# EAGLE board esp32-driver (EAGLE 9.6.2)
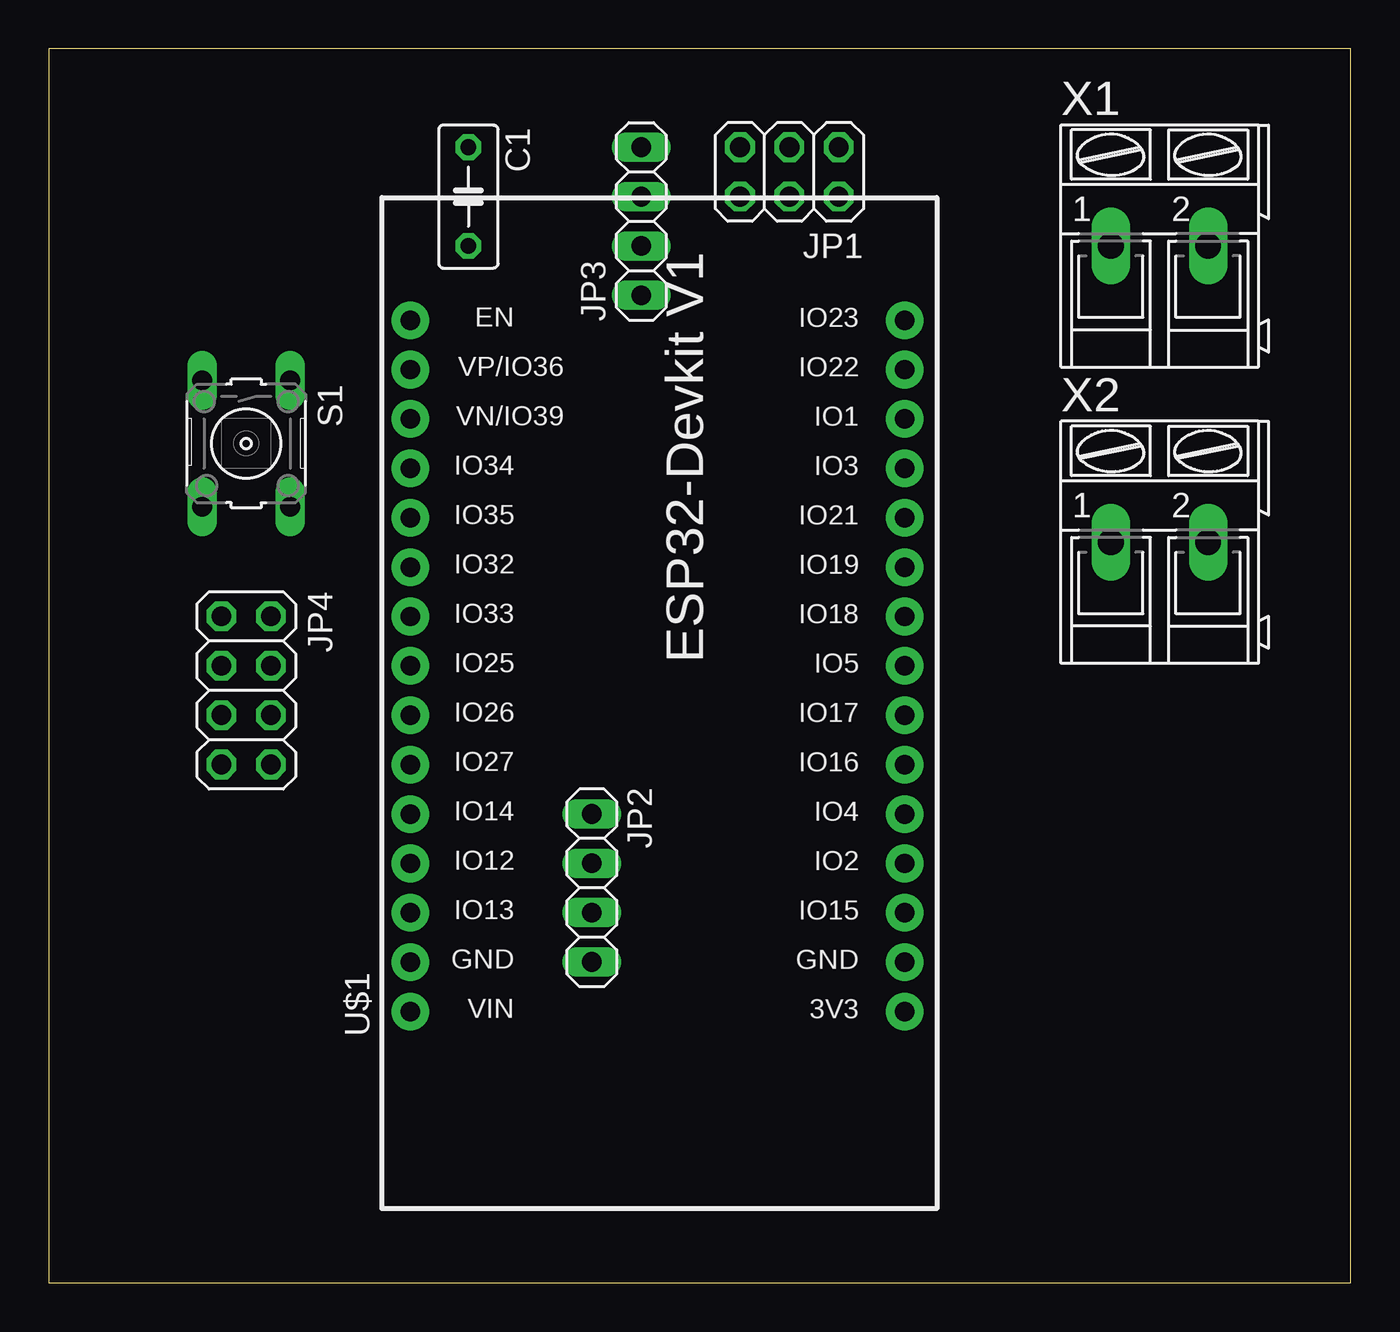
[diagram p0: board, top side]
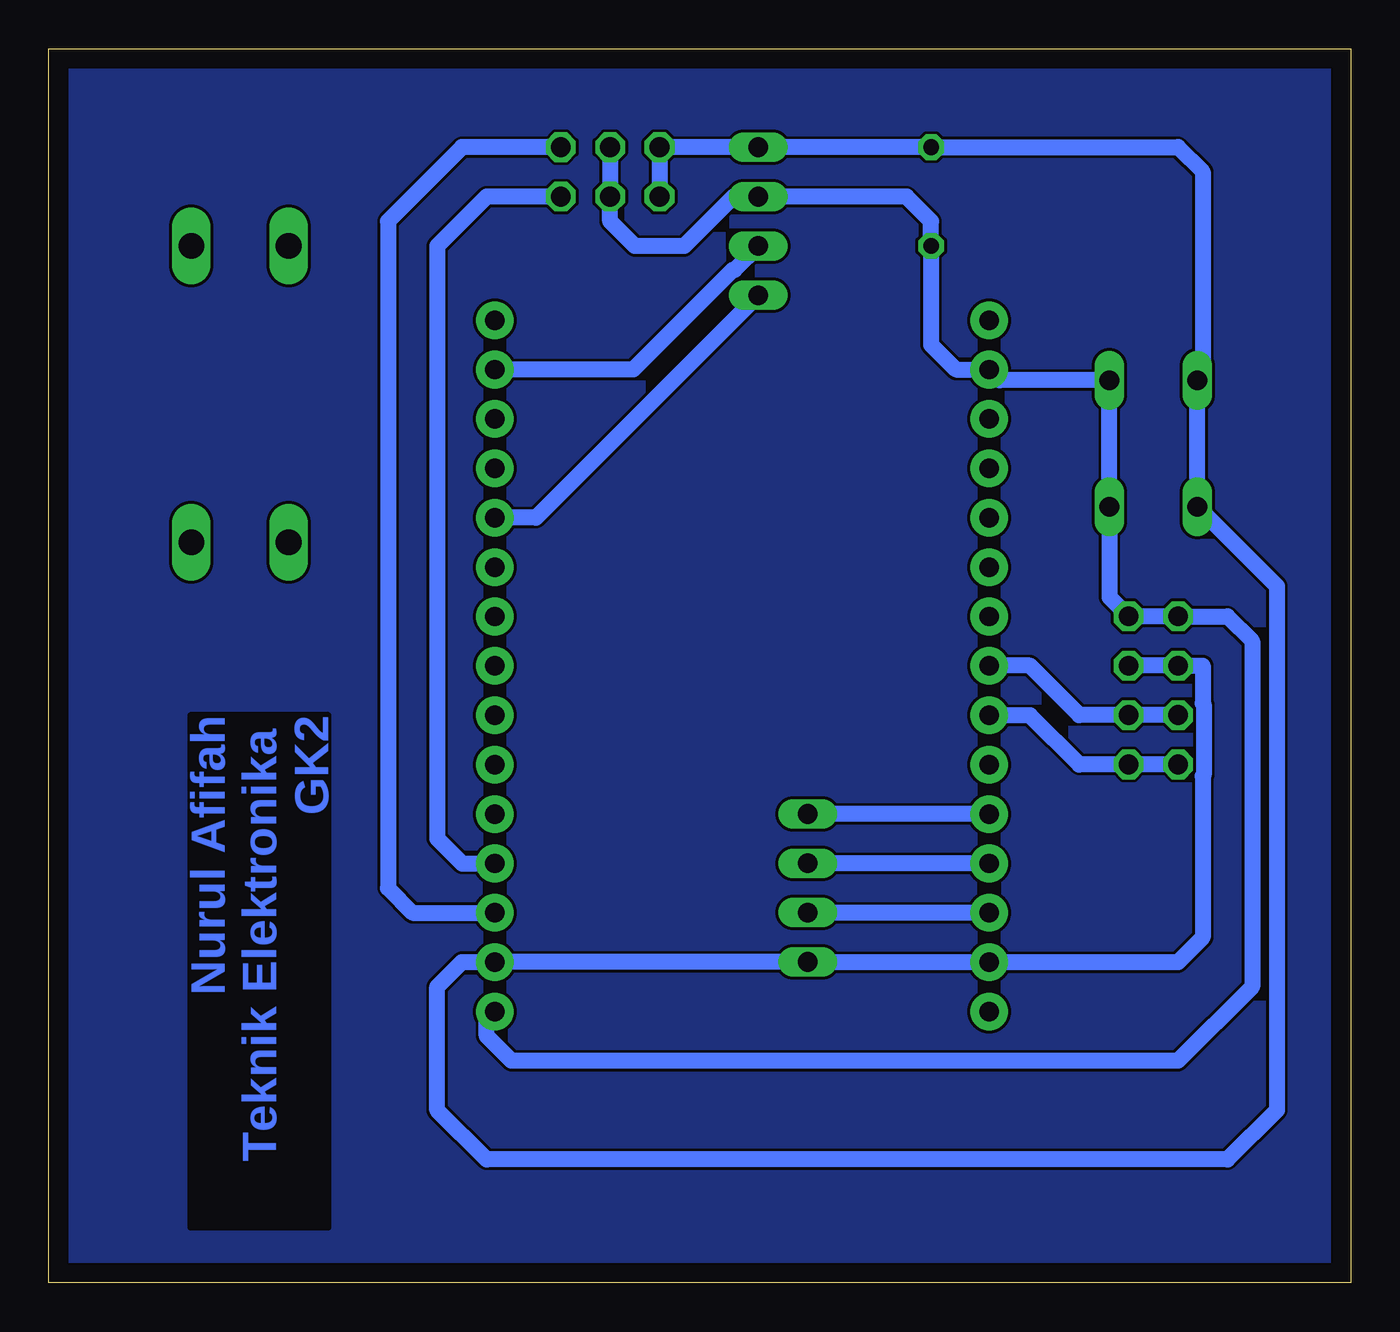
[diagram p1: board, bottom side, seen from below]

Size 66.98 x 63.49 mm. Coordinates in mm from the lower left corner, seen from the top.
Outline: 0,0 66.98,0 66.98,63.49 0,63.49 0,0
Copper layers (1*16): Top 0.035mm / dielectric 1.5mm / Bottom 0.035mm
Design rules "default": minimum track width 6mil, minimum drill 0.35mm, track to track 6mil, track to pad 6mil, pad to pad 6mil, via to via 6mil, smd to smd 6mil, copper to edge 40mil, drill to drill 6mil, minimum pad ring 10mil, minimum via ring 8mil, stop-mask expansion 4mil, vias tented up to drill 0mil, thermal gap 10mil

## Footprints (pad centres in the part's own frame; a part is rotated, then mirrored left to right if it is on the bottom)
C050-030X075 = drill 0.813 octagon: 1 -2.54,0; 2 2.54,0
2X03 = drill 1.016 octagon: 1 -2.54,-1.27; 2 -2.54,1.27; 3 0,-1.27; 4 0,1.27; 5 2.54,-1.27; 6 2.54,1.27
1X04 = drill 1.016 long: 1 -3.81,0; 2 -1.27,0; 3 1.27,0; 4 3.81,0
2X04 = drill 1.016 octagon: 1 -3.81,-1.27; 2 -3.81,1.27; 3 -1.27,-1.27; 4 -1.27,1.27; 5 1.27,-1.27; 6 1.27,1.27; 7 3.81,-1.27; 8 3.81,1.27
B3F-10XX = drill 1.016 long: 1 -3.251,2.261; 2 3.251,2.261; 3 -3.251,-2.261; 4 3.251,-2.261
ESP32-DEVKITV1 = drill 1 pad 1.93: 3V3 -16.52,-12.27; D1 13.96,-12.27; D2 -8.9,-12.27; D3 11.42,-12.27; D4 -6.36,-12.27; D5 1.26,-12.27; D12 -8.9,13.135; D13 -11.44,13.135; D14 -6.36,13.135; D15 -11.44,-12.27; D16 -3.82,-12.27; D17 -1.28,-12.27; D18 3.8,-12.27; D19 6.34,-12.27; D21 8.88,-12.27; D22 16.5,-12.27; D23 19.04,-12.27; D25 1.26,13.135; D26 -1.28,13.135; D27 -3.82,13.135; D32 6.34,13.135; D33 3.8,13.135; D34 11.42,13.135; D35 8.88,13.135; D36 16.5,13.135; D39 13.96,13.135; EN 19.04,13.135; GND@1 -13.98,13.135; GND@2 -13.98,-12.27; VIN -16.52,13.135
AK300/2 = drill 1.321 long: 1 -2.515,0; 2 2.489,0

## Placement (x,y rotation side)
C1  [C050-030X075]  21.59,55.88 270 top
JP1  [2X03]  38.1,57.15 180 top
JP2  [1X04]  27.94,20.32 270 top
JP3  [1X04]  30.48,54.61 90 top
JP4  [2X04]  10.16,30.48 270 top
S1  [B3F-10XX]  10.16,43.18 270 top
U$1  ESP32DEVKITV1  [ESP32-DEVKITV1]  31.75,30.48 90 top
X1  [AK300/2]  57.15,53.34 0 top
X2  [AK300/2]  57.15,38.1 0 top

## Library data of the parts
C1 = rcl; SPICEPREFIX: C
JP1-JP4 = pinhead
S1 = switch-omron; MPN: B3F-1000; OC_FARNELL: 176432; OC_NEWARK: 36M3542
U$1 = esp32-devkitv1
X1 X2 = con-ptr500; OC_FARNELL: unknown; OC_NEWARK: unknown

## Nets
GND: C1.1 JP1.5 JP1.6 JP2.4 JP3.4 JP4.3 JP4.4 S1.3 S1.4 U$1.GND@1 U$1.GND@2
MOISTURE: JP1.2 U$1.D2
OUT1: JP2.1 U$1.D14
OUT2: JP2.2 U$1.D12
OUT3: JP2.3 U$1.D13
PH: JP1.1 U$1.D15
SCL: JP3.2 U$1.D22
SCL2: JP4.5 JP4.6 U$1.D25
SDA: JP3.1 U$1.D21
SDA2: JP4.7 JP4.8 U$1.D26
V: C1.2 JP1.3 JP1.4 JP3.3 JP4.1 JP4.2 S1.1 S1.2 U$1.3V3 U$1.D36
VIN: U$1.VIN

## Tracks (layer width: path | path; a pad name or v marks a point on that pad's centre or on a via)
GND
  Bottom 0.813: JP1.6 JP1.5 JP3.4 C1.1 8.89,58.42 7.62,57.15 7.62,46.71 S1.3 S1.4 3.81,35.84 3.81,8.89 6.35,6.35 44.45,6.35 46.99,8.89 46.99,15.24 45.72,16.51 U$1.GND@2 | U$1.GND@2 | U$1.GND@2 JP2.4 U$1.GND@1 8.9,16.5 7.62,17.78 7.62,26.07 7.57,26.12 7.57,29.76 7.62,29.81 7.62,31.75 JP4.3 JP4.4
MOISTURE
  Bottom 0.813: JP1.2 44.45,55.88 46.99,53.34 46.99,22.86 45.71,21.58 U$1.D2
N$1
  pour Bottom: 0,63.5 67.31,63.5 67.31,0 0,0
OUT1
  Bottom 0.813: U$1.D14 JP2.1
OUT2
  Bottom 0.813: U$1.D12 JP2.2
OUT3
  Bottom 0.813: U$1.D13 JP2.3
PH
  Bottom 0.813: JP1.1 45.72,58.42 49.53,54.61 49.53,20.32 48.25,19.04 U$1.D15
SCL
  Bottom 0.813: JP3.2 31.7,52.12 31.79,52.12 36.92,46.99 44.45,46.99 44.44,46.98 U$1.D22
SCL2
  Bottom 0.813: JP4.5 JP4.6 13.97,29.21 16.51,31.75 18.6,31.75 U$1.D25
SDA
  Bottom 0.813: JP3.1 41.92,39.36 U$1.D21
SDA2
  Bottom 0.813: JP4.7 JP4.8 13.97,26.67 16.5,29.2 U$1.D26
V
  Bottom 0.813: JP1.3 JP1.4 38.1,54.61 36.83,53.34 34.29,53.34 31.75,55.88 JP3.3 22.86,55.88 21.59,54.61 C1.2 21.59,48.26 20.31,46.98 U$1.D36 18.07,46.43 S1.1 S1.2 12.42,35.28 JP4.2 JP4.1 6.35,34.29 5.08,33.02 5.08,15.24 8.89,11.43 43.18,11.43 44.45,12.7 44.45,13.53 U$1.3V3

## Text on the board
Bottom: Nurul Afifah / Teknik Elektronika / GK2